# Altium PCB DualLink.PcbDoc
Units mil, origin at the board's own origin, x right, y up, seen from the top; angles counter-clockwise.
Board outline 2100 x 1100 mil, 2 copper layers (Top Layer, Bottom Layer); 48 components, 41 nets, 162 pads, 49 vias.
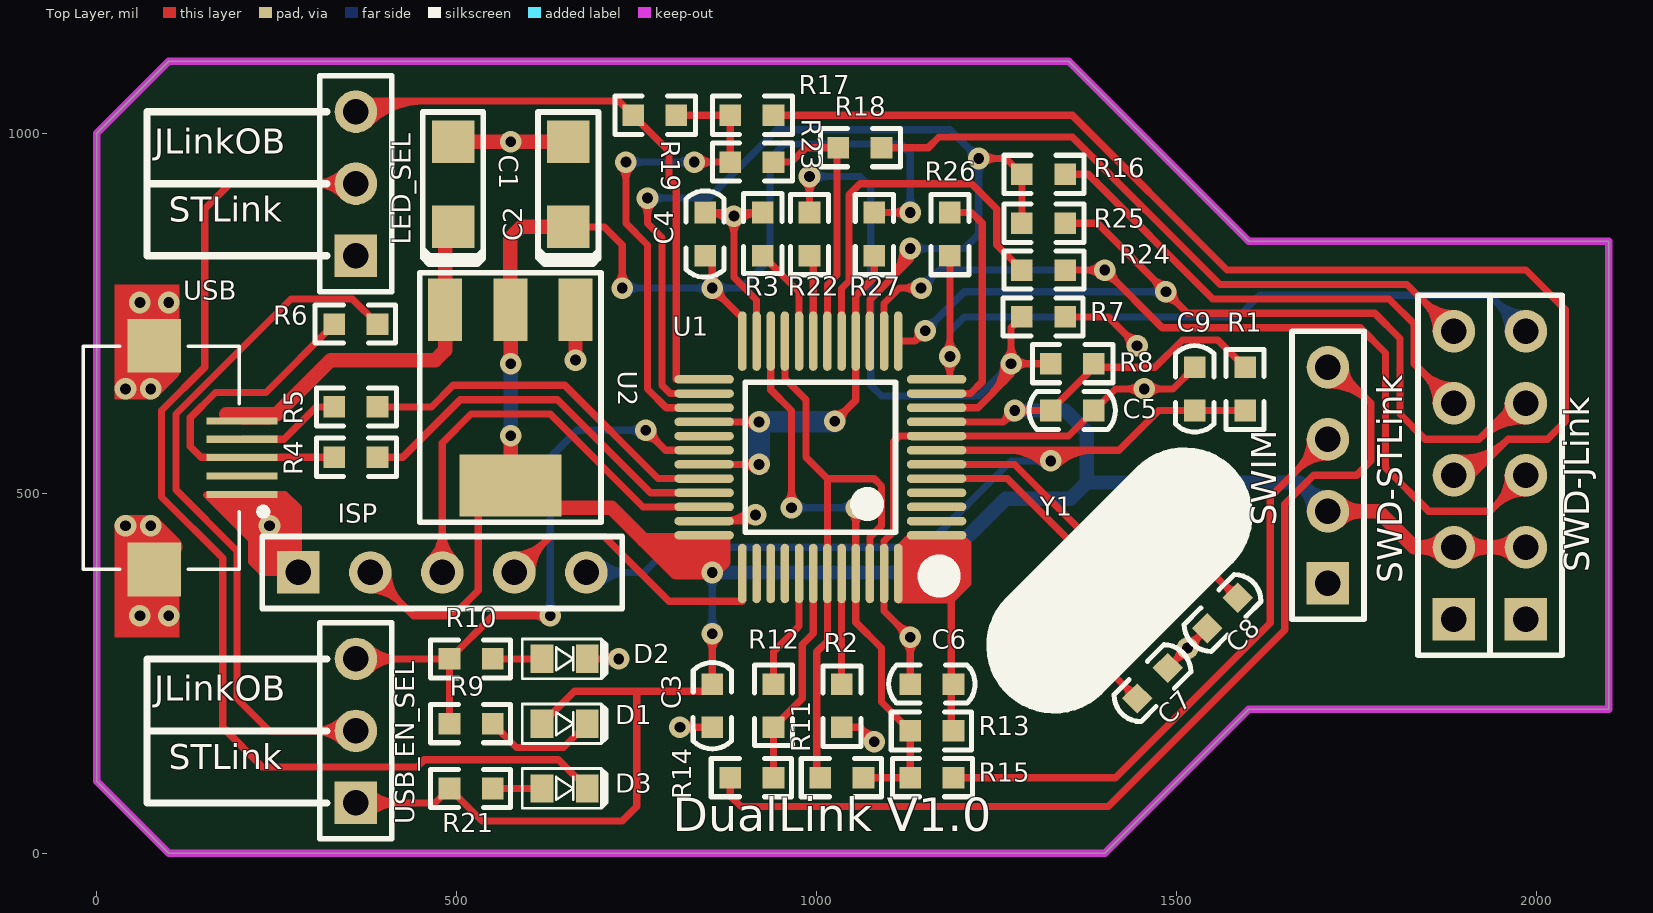
[diagram p0: Top Layer view]
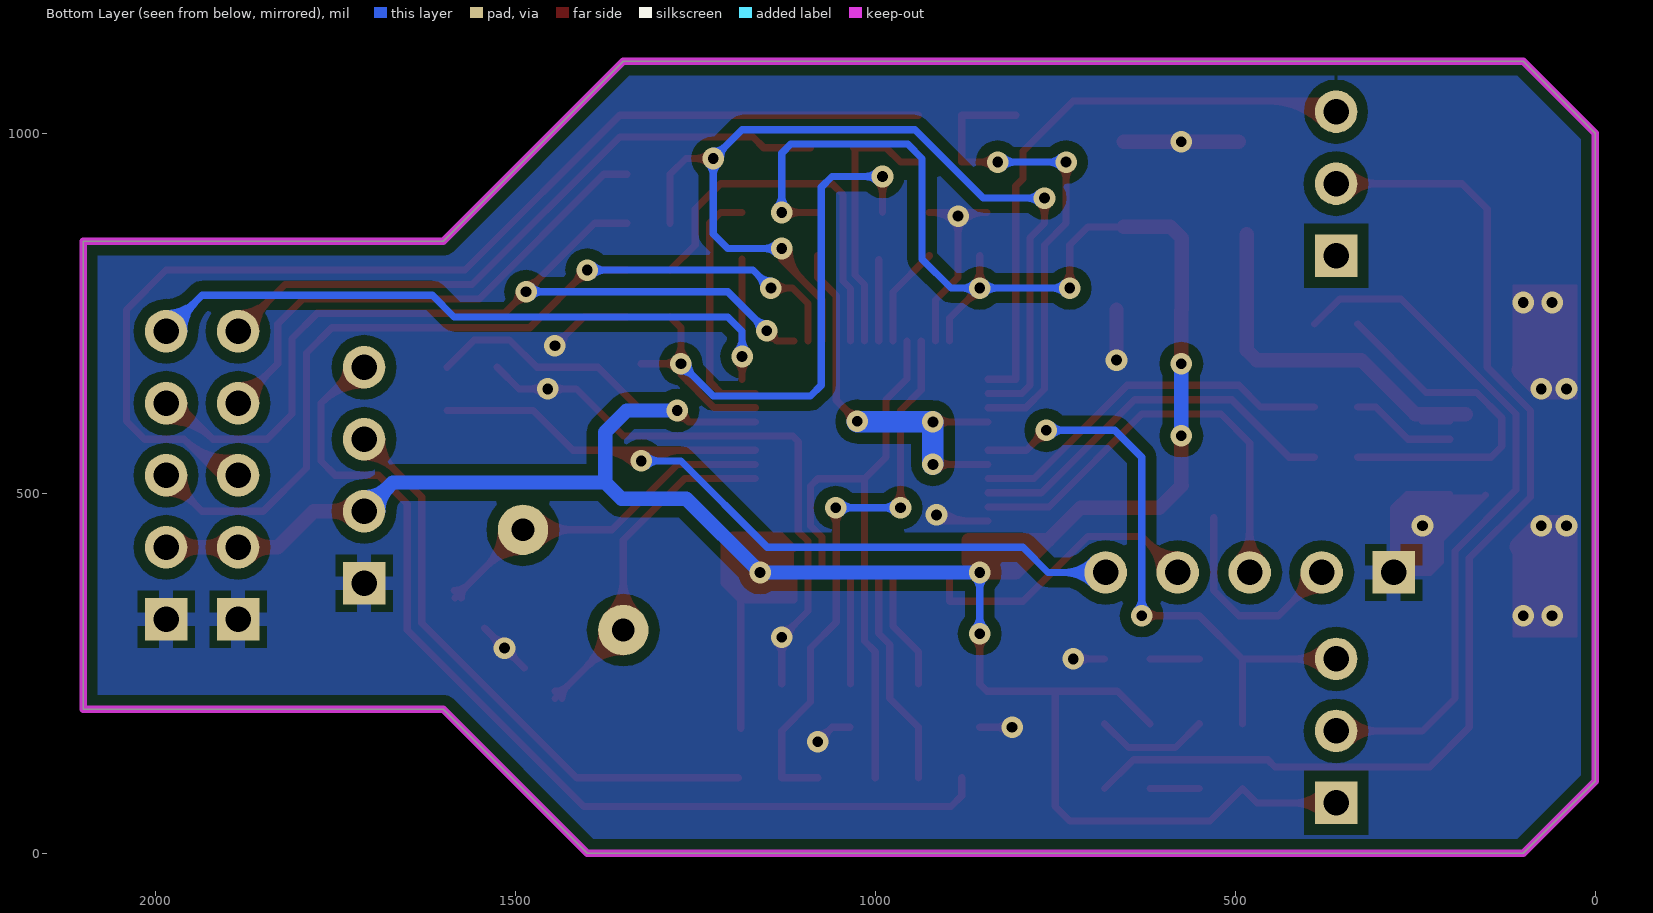
[diagram p1: Bottom Layer view, seen from below]
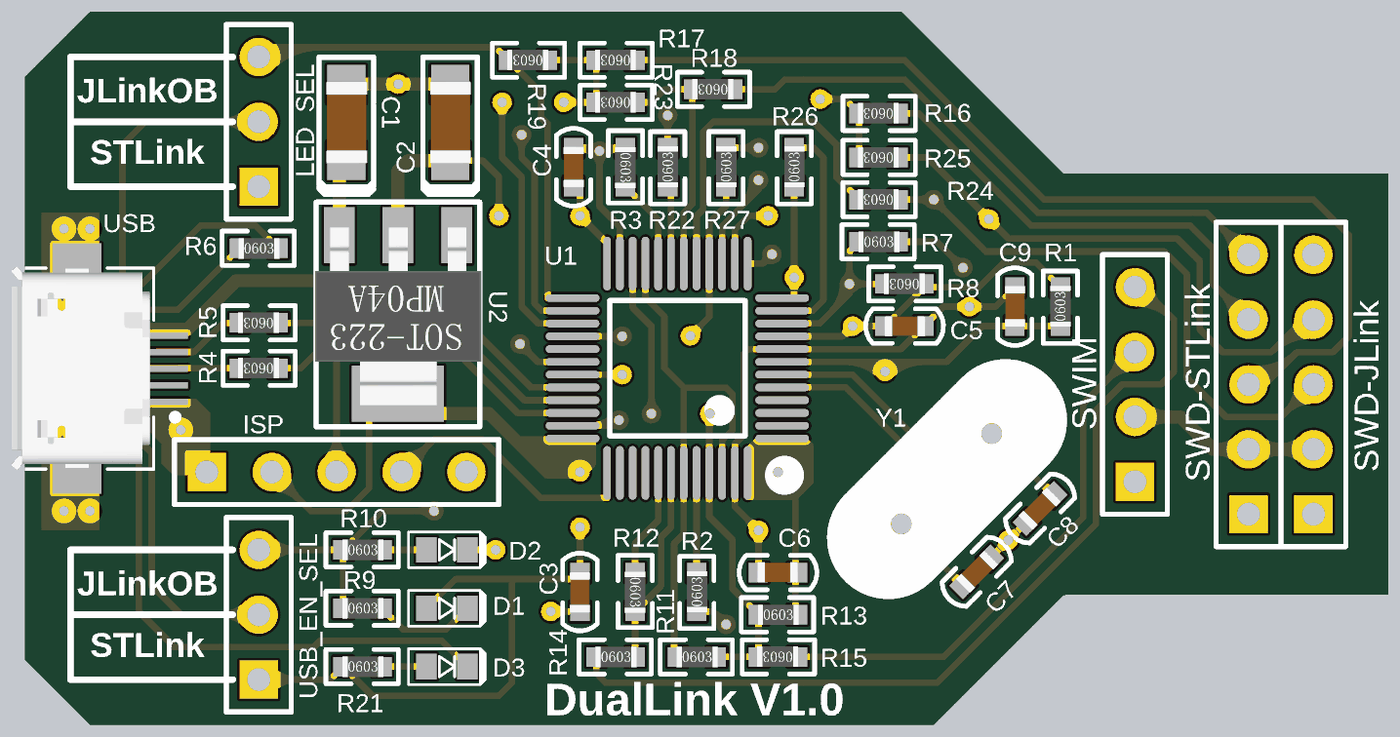
[diagram p2: 3D render of the assembled board from above, using the file's embedded part models]

## Layer stack, top to bottom
Top Layer: signal copper 1.4
Dielectric: dielectric 12.6, FR-4, Dk 4.8
Bottom Layer: signal copper 1.4

## Board outline
0,100 100,0 1400,0 1600,200 2100,200 2100,850 1600,850 1350,1100 100,1100 0,1000

## Design rules (kind name [scope] priority, off if disabled: settings)
Clearance Clearance_1 [InPolygon] p1: gap=15
Clearance [All] p2: gap=7
ComponentClearance [All] p1: gap=0 collisioncheckmode=3 verticalgap=0 showdistances=FALSE
MinimumSolderMaskSliver [All] p1: minsoldermaskwidth=0
PolygonConnect PolygonConnect_1 [isvia] p1: connectstyle=Direct reliefconductorwidth=10 reliefentries=4 polygonreliefangle="90 Angle" airgapwidth=10
PolygonConnect [All] p2: connectstyle=Relief reliefconductorwidth=20 reliefentries=4 polygonreliefangle="90 Angle" airgapwidth=10
RoutingVias [All] p1: holewidth=28 width=50 viastyle="Through Hole" minholewidth=10 minwidth=50 maxholewidth=28 maxwidth=500
SilkToSilkClearance [All] p1: silktosilkclearance=0
SilkToSolderMaskClearance [IsPad] p1: minsilkscreentomaskgap=0 clearancetoexposedcopper=TRUE
SolderMaskExpansion [All] p1: expansion=4
Width [All] p1: maxlimit=1000 minlimit=10 preferedwidth=10
24 further rules are at their usual default settings.

## Components (designator, comment, footprint, x,y, rotation, side; value= is the part's Value field where it differs from the comment)
C1 "" C1206A 495,870 r90 top
C2 "" C1206A 655,870 r90 top
C3 "" C0603 855,235 r270 top
C4 "" C0603 845,830 r90 top
C5 "" C0603 1325,615 r0 top
C6 "" C0603 1190,235 r180 top
C7 "" C0603 1445,215 r45 top
C8 "" C0603 1585,355 r225 top
C9 "" C0603 1525,615 r90 top
D1 "红色" LED0603 650,180 r0 top
D2 "绿色" LED0603 650,270 r0 top
D3 "LED" LED0603 650,90 r0 top
ISP "SWD" HDR1X5 280,390 r0 top
LED_SEL "" HDR1X3 360,830 r90 top
R1 "" R0603 1595,615 r90 top
R2 "" R0603 1035,175 r90 top
R3 "" R0603 925,890 r270 top
R4 "" R0603 390,550 r180 top
R5 "" R0603 390,620 r180 top
R6 "" R0603 330,735 r0 top
R7 "" R0603 1285,745 r0 top
R8 "" R0603 1385,680 r180 top
R9 "" R0603 490,180 r0 top
R10 "" R0603 490,270 r0 top
R11 "" R0603 1005,105 r0 top
R12 "" R0603 940,235 r270 top
R13 "" R0603 1130,170 r0 top
R14 "" R0603 880,105 r0 top
R15 "" R0603 1190,105 r180 top
R16 "" R0603 1345,943 r180 top
R17 "" R0603 940,1025 r180 top
R18 "" R0603 1090,980 r180 top
R19 "" R0603 805,1025 r180 top
R21 "" R0603 490,90 r0 top
R22 "" R0603 990,830 r90 top
R23 "" R0603 940,960 r180 top
R24 "" R0603 1345,810 r180 top
R25 "" R0603 1345,875 r180 top
R26 "" R0603 1185,830 r90 top
R27 "" R0603 1080,830 r90 top
SWD-JLink "SWD" HDR1X5 1985,325 r90 top
SWD-STLink "SWD" HDR1X5 1885,325 r90 top
SWIM "SWIM" HDR1X4 1710,375 r90 top
U1 "STM32F103C8T6" LQFP48_M 1005,550 r180 top
U2 "AMS1117-3.3" SOT-223 665,755 r180 top
USB "USB_Micro" USB_MICRO_B 80,550 r270 top
USB_EN_SEL "" HDR1X3 360,70 r90 top
Y1 "8MHz" JZ 1350,310 r225 top

## Footprints (in the part's own frame and the unit in brackets; to place one, negate y for a bottom-side part, rotate by r counter-clockwise, add the part's x,y. Pads: shape width x height; smd on the part's side, far side on the other; paste and mask are expansions set on the pad)
C0603 [mil]
  rect 30x30 smd: 1(0,0) 2(60,0)
  silkscreen extent -30,-27 90,27, body extent -1,-16 62,15, height 24
C1206A [mm]
  rect 1.5x1.5 smd: 1(0,0) 2(3,0)
  silkscreen extent -1.32,-1.07 4.06,1.07, body extent -0.1,-0.81 3.1,0.79, height 0.95
HDR1X3 [mm] "Connector; Header; 3 Position"
  rect 1.5x1.5 hole 0.9: 1(0,0)
  round 1.5 hole 0.9: 2(2.54,0) 3(5.08,0)
  silkscreen extent -1.27,-1.27 6.35,1.27
HDR1X4 [mm] "Connector; Header; 4 Position"
  rect 1.5x1.5 hole 0.9: 1(0,0)
  round 1.5 hole 0.9: 2(2.54,0) 3(5.08,0) 4(7.62,0)
  silkscreen extent -1.27,-1.27 8.89,1.27
HDR1X5 [mm] "Connector; Header; 5 Position"
  rect 1.5x1.5 hole 0.9: 1(0,0)
  round 1.5 hole 0.9: 2(2.54,0) 3(5.08,0) 4(7.62,0) 5(10.16,0)
  silkscreen extent -1.27,-1.27 11.43,1.27
JZ [mil]
  round 70 hole 31.5: 1(0,0) 2(-197,0)
  silkscreen extent -315,-88 118,90
LED0603 [mm]
  rect 0.8x1 smd: 1(-0.8,0) 2(0.8,0)
  silkscreen extent -1.5,-0.7 1.5,0.7
LQFP48_M [mm] "Thin QFP, 48-Leads, Body 7x7mm, Pitch 0.5mm, IPC Low Density"
  oval 2.1x0.3 smd: 1(-4.1,2.75) 2(-4.1,2.25) 3(-4.1,1.75) 4(-4.1,1.25) 5(-4.1,0.75) 6(-4.1,0.25) 7(-4.1,-0.25) 8(-4.1,-0.75) 9(-4.1,-1.25) 10(-4.1,-1.75) 11(-4.1,-2.25) 12(-4.1,-2.75) 25(4.1,-2.75) 26(4.1,-2.25) 27(4.1,-1.75) 28(4.1,-1.25) 29(4.1,-0.75) 30(4.1,-0.25) 31(4.1,0.25) 32(4.1,0.75) 33(4.1,1.25) 34(4.1,1.75) 35(4.1,2.25) 36(4.1,2.75)
  oval 0.3x2.1 smd: 13(-2.75,-4.1) 14(-2.25,-4.1) 15(-1.75,-4.1) 16(-1.25,-4.1) 17(-0.75,-4.1) 18(-0.25,-4.1) 19(0.25,-4.1) 20(0.75,-4.1) 21(1.25,-4.1) 22(1.75,-4.1) 23(2.25,-4.1) 24(2.75,-4.1) 37(2.75,4.1) 38(2.25,4.1) 39(1.75,4.1) 40(1.25,4.1) 41(0.75,4.1) 42(0.25,4.1) 43(-0.25,4.1) 44(-0.75,4.1) 45(-1.25,4.1) 46(-1.75,4.1) 47(-2.25,4.1) 48(-2.75,4.1)
  silkscreen extent -4.57,-2.65 2.65,4.57, body extent -3.5,-3.5 3.5,3.5, height 1.6
R0603 [mil]
  rect 30x30 smd: 1(0,0) 2(60,0)
  silkscreen extent -26,-26 85,27, body extent -1,-16 62,15, height 18
SOT-223 [mm]
  rect 1.2x2.2 smd: 1(0,0) 2(2.3,0) 3(4.6,0)
  rect 3.6x2.2 smd: 4(2.3,6.2)
  silkscreen extent -0.9,-1.3 5.5,7.5, body extent -0.97,-0.31 5.53,6.66
USB_MICRO_B [mm]
  rect 0.25x2.5 smd: 1(-1.287,3.095) 2(-0.637,3.095) 3(0.013,3.095) 4(0.663,3.095) 5(1.313,3.095)
  rect 1.9x1.9 smd: 5(-3.937,0) 5(3.963,0)
  silkscreen extent -3.92,-2.51 3.95,3.97, body extent -3.99,-2.58 3.99,2.85, height 2.71

## Part data
C1 C2: library part "Cap Pol3", "Polarized Capacitor (Surface Mount)"
C3 C4 C5 C6 C7 C8 C9: library part Cap, "Capacitor"
D1 D2 D3: library part LED2, "Typical RED, GREEN, YELLOW, AMBER GaAs LED"
ISP SWD-JLink SWD-STLink: library part "Header 5", "Header, 5-Pin"
LED_SEL USB_EN_SEL: library part "Header 3", "Header, 3-Pin"
R1 R2 R3 R4 R5 R6 R7 R8 R9 R10 R11 R12 R13 R14 R15 R16 R17 R18 R19 R21 R22 R23 R24 R25 R26 R27: library part Res2, "Resistor"
SWIM: library part "Header 4", "Header, 4-Pin"
U1: "STM32 ARM-based 32-bit MCU with 64 Kbytes Flash, 48-pin LQFP, Industrial Temperature"
U2: library part TL783C
USB: "USB"
Y1: library part XTAL, "Crystal Oscillator"

## Via types
v1: diameter 30, hole 15, Top Layer to Bottom Layer, 34 vias
v2: diameter 30, hole 15, Top Layer to Bottom Layer, tented both sides, 15 vias

## Nets (pads, with @x,y where several pads share a name; then routed paths per layer and width w, separated by ;. In a path a pad name is that pad's centre, name@x,y a point inside that pad or via, vN(x,y) a via of type N, cw(c..) or ccw(c..) an arc to the next point about the centre after c; other vN are vias at no path point)
BOOT0: R2.2 U1.44 | length 153.1
  Top Layer w10: R2.2@1034.53,235.47 U1.44
BOOT1: R3.2 U1.20 | length 139.5
  Top Layer w10: R3.2 975.47,779.53 U1.20
GND: C1.2 C2.2 C3.2 C4.2 C5.2 C6.2 C7.2 C8.2 C9.2 D2.2 ISP.1 R2.1 R3.1 R7.2 SWD-JLink.1 SWD-STLink.1 SWIM.1 U1.8 U1.23 U1.35 U1.47 U2.1 USB.5 | length 3047.6
  Top Layer w10: 152.5,497.5 215,435 215,405 230,390 ISP.1 280,480 261.69,498.31 USB.5@201.84,498.31 ; D2.2 v1(725,270) ; v1(810,175) C3.2 ; v1@817.07,167.93 cw(c834.14,150.86) 834.14,175 cw(c834.14,199.14) v1@817.07,182.07 ; U1.35 906.42,461.42 v2(915,470) cw(c894.28,490.72) 894.28,461.42 ; C4.2 R3.1 ; C4.2@848.79,890 cw(c848.79,848.79) 877.93,877.93 cw(c860.86,860.86) 885,860.86 cw(c909.14,860.86) 892.07,877.93 cw(c921.21,848.79) R3.1@921.21,890 ; U1.35@870.14,461.42 ccw(c870.14,514.86) v2@907.93,477.07 ; v2@885,890 885,800 916.42,768.58 U1.23 ; R2.1 1060,175 v2(1080,155) ; v2@1070,155 ccw(c1045.86,155) 1062.93,172.07 ccw(c1080,189.14) v2@1080,165 ; v1@1120,300 ccw(c1095.86,300) 1112.93,317.07 ccw(c1130,334.14) v1@1130,310 ; v1@1122.93,292.93 cw(c1105.86,275.86) 1130,275.86 cw(c1154.14,275.86) v1@1137.07,292.93 ; C6.2 v1(1130,300) 1093.58,336.42 U1.47 1093.58,433.58 1107,447 1107,572 1114.53,579.53 U1.8 1349.53,579.53 C5.2 1415,645 1495,645 C9.2 ; R7.2 1405,745 v2(1445,705) ; 1431.62,717.6 ccw(c1448.51,722.12) v2(1445,705) ; 1432.4,718.38 cw(c1427.88,701.49) v2(1445,705) ; C7.2 C8.2 ; v1@1505,285 cw(c1480.86,285) 1497.93,267.93 cw(c1515,250.86) v1@1515,275 ; v1@1515,295 ccw(c1515,319.14) 1532.07,302.07 ccw(c1549.14,285) v1@1525,285 ; 700.86,270 ccw(c700.86,294.14) 717.93,277.07 cw(c700.86,294.14) 700.86,270 ; 700.86,270 cw(c700.86,245.86) 717.93,262.93 ccw(c700.86,245.86) 700.86,270 ; 1427.93,722.07 ccw(c1445,739.14) 1445,715 cw(c1445,739.14) 1427.93,722.07 ; 1427.93,722.07 cw(c1410.86,705) 1435,705 ccw(c1410.86,705) 1427.93,722.07 ; 1430.86,645 ccw(c1430.86,669.14) 1447.93,652.07 cw(c1430.86,669.14) 1430.86,645 ; 1430.86,645 cw(c1430.86,620.86) 1447.93,637.93 ccw(c1430.86,620.86) 1430.86,645 ; 1479.14,645 ccw(c1479.14,620.86) 1462.07,637.93 cw(c1479.14,620.86) 1479.14,645 ; 1479.14,645 cw(c1479.14,669.14) 1462.07,652.07 ccw(c1479.14,669.14) 1479.14,645
  Top Layer w20: C1.2 C2.2 ; v1(665,685) U2.1
  Top Layer w30: 40,405 40,435 ; v1(75,645) USB.5@101.59,671.59 ; 90,435 40,435 ; USB.5@104.09,425.91 v1(75,455) v1(40,455) 40,435
  other v1: 1515,285 60,330 100,330 240,455 40,645 1455,645 60,765 100,765 575,988.11
  other v2: 885,885
ISP_RST: C9.1 ISP.5 R1.1 U1.7 | length 1585.5
  Top Layer w10: U1.7 1419.84,559.84 1475,615 R1.1 ; 1265.02,559.84 cw(c1265.02,485.02) v1@1317.93,537.93 ; 1289.17,559.84 cw(c1289.17,509.17) v1(1325,545) cw(c1360.83,509.17) 1360.83,559.84 ; 1313.31,559.84 cw(c1313.31,533.31) v1@1332.07,552.07 ; v1@1317.93,552.07 cw(c1336.69,533.31) 1336.69,559.84 ; v1@1332.07,537.93 cw(c1384.98,485.02) 1384.98,559.84
  Bottom Layer w10: ISP.5 760,390 795,425 1150,425 1270,545 v1(1325,545) ; ISP.5@690.27,379.73 cw(c715.07,354.93) 715.07,390 cw(c715.07,425.07) ISP.5@690.27,400.27 ; ISP.5@697.34,372.66 cw(c739.21,330.79) 739.21,390 cw(c739.21,449.21) ISP.5@697.34,407.34 ; v1@1317.93,537.93 ccw(c1300.86,520.86) 1300.86,545 ccw(c1300.86,569.14) v1@1317.93,552.07
ISP_SWCLK: ISP.4 U1.37 | length 561.4
  Top Layer w10: ISP.4 630,440 705,440 795,350 896.73,350 U1.37 ; ISP.4@580,404.53 ccw(c580,439.6) 604.8,414.8 ccw(c629.6,390) ISP.4@594.53,390 ; ISP.4@580,414.53 ccw(c580,473.74) 621.87,431.87 ccw(c663.74,390) ISP.4@604.53,390
ISP_SWDIO: ISP.3 U1.34 | length 761.6
  Top Layer w10: ISP.3@462.66,407.34 ccw(c420.79,449.21) 480,449.21 ccw(c539.21,449.21) ISP.3@497.34,407.34 ; ISP.3@469.73,400.27 ccw(c444.93,425.07) 480,425.07 ccw(c515.07,425.07) ISP.3@490.27,400.27 ; ISP.3 480,570 520,610 630,610 758.9,481.1 U1.34
JTCK: R16.2 R25.2 U1.15 U1.26 | length 1648.1
  Top Layer w10: v2@757.93,902.93 cw(c740.86,885.86) 765,885.86 cw(c789.14,885.86) v2@772.07,902.93 ; v2(765,910) 765,875 785,855 785,650 796.42,638.58 U1.26 ; U1.15 1073.9,768.9 1130,825 v2(1130,840) cw(c1093.79,840) 1119.39,814.39 ; 1102.32,797.32 ccw(c1059.64,840) v2@1120,840 ; v1(1225,965) 1263,965 R16.2 R25.2 ; v1@1232.07,957.93 cw(c1249.14,940.86) 1249.14,965 cw(c1249.14,989.14) v1@1232.07,972.07
  Bottom Layer w10: v2(765,910) 850,910 945,1005 1185,1005 v1(1225,965) 1225,860 1205,840 v2(1130,840) ; v2@772.07,902.93 cw(c789.14,885.86) 789.14,910 cw(c789.14,934.14) v2@772.07,917.07 ; v2@1137.07,832.93 cw(c1154.14,815.86) 1154.14,840 cw(c1154.14,864.14) v2@1137.07,847.07 ; v1@1215,965 ccw(c1190.86,965) 1207.93,982.07 ccw(c1225,999.14) v1@1225,975 ; v1@1217.93,957.93 cw(c1200.86,940.86) 1225,940.86 cw(c1249.14,940.86) v1@1232.07,957.93
JTMS: R17.2 R19.1 R23.2 U1.27 | length 853.5
  Top Layer w10: v1@727.93,952.93 cw(c710.86,935.86) 735,935.86 cw(c759.14,935.86) v1@742.07,952.93 ; v1(735,960) 735,875 765,845 765,645 791.1,618.9 U1.27 ; R19.1 R17.2 R23.2 v1(830,960) ; v1@837.07,952.93 cw(c854.14,935.86) 854.14,960 cw(c854.14,984.14) v1@837.07,967.07
  Bottom Layer w10: v1(735,960) v1(830,960) ; v1@742.07,952.93 cw(c759.14,935.86) 759.14,960 cw(c759.14,984.14) v1@742.07,967.07 ; v1@822.93,952.93 ccw(c805.86,935.86) 805.86,960 ccw(c805.86,984.14) v1@822.93,967.07
LED: R9.1 R10.1 U1.30 USB_EN_SEL.3 | length 1145.2
  Top Layer w10: USB_EN_SEL.3 R10.1 ; USB_EN_SEL.3@370.27,259.73 cw(c395.07,234.93) 395.07,270 cw(c395.07,305.07) USB_EN_SEL.3@370.27,280.27 ; USB_EN_SEL.3@377.34,252.66 cw(c419.21,210.79) 419.21,270 cw(c419.21,329.21) USB_EN_SEL.3@377.34,287.34 ; R9.1 R10.1 ; v2@622.93,322.93 ccw(c605.86,305.86) 605.86,330 ccw(c605.86,354.14) v2@622.93,337.07 ; v2(630,330) 550,330 R10.1 ; v2@762.5,577.5 cw(c762.5,553.36) 779.57,570.43 cw(c796.64,587.5) v2@772.5,587.5 ; v2(762.5,587.5) 790.16,559.84 U1.30
  Bottom Layer w10: v2@622.93,337.07 ccw(c605.86,354.14) 630,354.14 ccw(c654.14,354.14) v2@637.07,337.07 ; v2(630,330) 630,550 667.5,587.5 v2(762.5,587.5) ; v2@755.43,580.43 ccw(c738.36,563.36) 738.36,587.5 ccw(c738.36,611.64) v2@755.43,594.57
LED2: LED_SEL.3 R19.2 U1.25 | length 1033
  Top Layer w10: LED_SEL.3 375,1045 725,1045 R19.2 795,975 795,936.73 805,926.73 805,658.27 U1.25 ; LED_SEL.3@363.2,1026.8 cw(c407.14,982.86) 407.14,1045 ; LED_SEL.3@370.27,1019.73 cw(c431.29,958.71) 431.29,1045 ; LED_SEL.3@377.34,1012.66 cw(c455.43,934.57) 455.43,1045
NetD1_2: D1.2 R9.2 | length 158.8
  Top Layer w10: R9.2 583,147 648.5,147 D1.2
NetD2_1: D2.1 R10.2 | length 68.5
  Top Layer w10: R10.2 D2.1
NetD3_1: D3.1 R21.2 | length 68.5
  Top Layer w10: R21.2 D3.1
NetD3_2: D3.2 LED_SEL.2 | length 1702.7
  Top Layer w10: LED_SEL.2@342.66,912.66 ccw(c300.79,870.79) 300.79,930 ccw(c300.79,989.21) LED_SEL.2@342.66,947.34 ; LED_SEL.2@349.73,919.73 ccw(c324.93,894.93) 324.93,930 ccw(c324.93,965.07) LED_SEL.2@349.73,940.27 ; LED_SEL.2 185,930 150,895 150,675 90,615 90,495 175,410 175,175 230,120 445,120 455,130 641.5,130 D3.2
NetR4_1: R4.1 U1.33 | length 540.2
  Top Layer w10: R4.1 425,550 505,630 640,630 769.21,500.79 U1.33
NetR5_1: R5.1 U1.32 | length 519.7
  Top Layer w10: R5.1 465,620 495,650 650,650 779.53,520.47 U1.32
NetR6_2: R6.2 USB_EN_SEL.2 | length 1122.7
  Top Layer w10: USB_EN_SEL.2@342.66,152.66 ccw(c300.79,110.79) 300.79,170 ccw(c300.79,229.21) USB_EN_SEL.2@342.66,187.34 ; USB_EN_SEL.2@349.73,159.73 ccw(c324.93,134.93) 324.93,170 ccw(c324.93,205.07) USB_EN_SEL.2@349.73,180.27 ; USB_EN_SEL.2 240,170 195,215 195,420 110,505 110,610 270,770 355,770 R6.2
NetR14_1: R14.1 SWIM.4 | length 1512.8
  Top Layer w10: R14.1 880,80 895,65 1405,65 1650,310 1650,485 1690,525 1750,525 1770,545 1770,625 SWIM.4@1720,675 ; SWIM.4@1710,650.47 cw(c1710,567.12) 1768.94,626.06 ; SWIM.4@1710,660.47 cw(c1710,601.26) 1751.87,643.13 ; SWIM.4@1734.53,675 ccw(c1769.6,675) 1744.8,650.2
NetR15_1: R15.1 SWIM.3 | length 965.3
  Top Layer w10: R15.1 1415,105 1630,320 1630,495 SWIM.3 ; SWIM.3@1685.47,575 cw(c1626.26,575) 1668.13,533.13 cw(c1710,491.26) SWIM.3@1710,550.47 ; SWIM.3@1695.47,575 cw(c1660.4,575) 1685.2,550.2 cw(c1710,525.4) SWIM.3@1710,560.47
NetR16_1: R16.1 SWD-STLink.4 | length 852
  Top Layer w10: R16.1 1377,943 1550,770 1795,770 1830,735 1830,680 SWD-STLink.4 ; SWD-STLink.4@1860.47,625 ccw(c1801.26,625) 1843.13,666.87 ccw(c1885,708.74) SWD-STLink.4@1885,649.53 ; SWD-STLink.4@1870.47,625 ccw(c1835.4,625) 1860.2,649.8 ccw(c1885,674.6) SWD-STLink.4@1885,639.53
NetR17_1: R17.1 SWD-STLink.3 | length 1780
  Top Layer w10: R17.1 1355,1025 1570,810 1985,810 2040,755 2040,600 2015,575 1960,575 ; SWD-STLink.3@1884.42,519.56 ccw(c1888.46,557.68) 1915.57,530.57 ; SWD-STLink.3 1910,525 1960,575 ; SWD-STLink.3@1885.48,529.5 ccw(c1891.3,584.46) 1930.38,545.38 ; SWD-STLink.3@1886.53,539.45 ccw(c1894.14,611.24) 1945.19,560.19 ; SWD-STLink.3@1887.59,549.39 ccw(c1896.98,638.01) 1960,575
NetR18_1: R18.1 SWD-STLink.5 | length 1061.2
  Top Layer w10: R18.1 1155,980 1170,995 1355,995 1560,790 1820,790 SWD-STLink.5 ; SWD-STLink.5@1860.47,725 ccw(c1801.26,725) 1843.13,766.87 ccw(c1885,808.74) SWD-STLink.5@1885,749.53 ; SWD-STLink.5@1870.47,725 ccw(c1835.4,725) 1860.2,749.8 ccw(c1885,774.6) SWD-STLink.5@1885,739.53
NRST: R18.2 R23.1 U1.18 | length 372.3
  Top Layer w10: R23.1 965,960 985,980 R18.2 ; U1.18 1014.84,789.84 1028,803 R18.2@1028,980
OSC_IN: C7.1 U1.5 Y1.1 | length 895.5
  Top Layer w10: U1.5 1264.53,520.47 1350,435 Y1.1 C7.1 ; Y1.1@1328.79,331.21 ccw(c1277.57,382.43) 1350,382.43 ccw(c1422.43,382.43) Y1.1@1371.21,331.21 ; Y1.1@1335.86,324.14 ccw(c1301.72,358.28) 1350,358.28 ccw(c1398.28,358.28) Y1.1@1364.14,324.14 ; Y1.1@1350,280 cw(c1350,207.57) 1401.21,258.79 cw(c1452.43,310) Y1.1@1380,310 ; Y1.1@1350,290 cw(c1350,241.72) 1384.14,275.86 cw(c1418.28,310) Y1.1@1370,310 ; C7.1@1435,215 ccw(c1410.86,215) 1427.93,232.07 ccw(c1445,249.14) C7.1@1445,225
OSC_OUT: C8.1 U1.6 Y1.2 | length 911
  Top Layer w10: U1.6 1274.84,540.16 1365.7,449.3 Y1.2 C8.1@1583.6,355 ; Y1.2@1468.09,428.09 ccw(c1416.87,376.87) 1416.87,449.3 ccw(c1416.87,521.73) Y1.2@1468.09,470.51 ; Y1.2@1475.16,435.16 ccw(c1441.02,401.02) 1441.02,449.3 ccw(c1441.02,497.58) Y1.2@1475.16,463.44 ; Y1.2@1489.3,419.3 cw(c1489.3,346.87) 1540.51,398.09 cw(c1591.73,449.3) Y1.2@1519.3,449.3 ; Y1.2@1489.3,429.3 cw(c1489.3,381.02) 1523.44,415.16 cw(c1557.58,449.3) Y1.2@1509.3,449.3 ; 1565.54,373.06 ccw(c1585,392.52) C8.1@1585,365 ; 1568.92,369.68 cw(c1554.24,355) C8.1@1575,355
PA0: R7.1 R8.2 R22.2 U1.10 | length 1165.4
  Top Layer w10: v2@982.93,932.93 cw(c965.86,915.86) 990,915.86 cw(c1014.14,915.86) v2@997.07,932.93 ; R22.2 v2(990,940) ; U1.10 1223.9,618.9 1270,665 v2(1270,680) ; 1242.32,637.32 ccw(c1199.64,680) v2@1260,680 ; 1259.39,654.39 ccw(c1233.79,680) v2(1270,680) ; v2@1262.93,687.07 ccw(c1245.86,704.14) 1270,704.14 ccw(c1294.14,704.14) 1277.07,687.07 ccw(c1294.14,704.14) 1294.14,680 ccw(c1294.14,655.86) v2@1277.07,672.93 ; R7.1 1270,730 v2(1270,680) ; R8.2 v2(1270,680)
  Bottom Layer w10: v2(990,940) 1060,940 1075,925 1075,650 1090,635 1225,635 v2(1270,680) ; v2@997.07,932.93 cw(c1014.14,915.86) 1014.14,940 cw(c1014.14,964.14) v2@997.07,947.07 ; v2@1260,680 cw(c1235.86,680) 1252.93,662.93 cw(c1270,645.86) v2@1270,670
RX: R27.1 U1.16 U1.28 U1.31 | length 835.1
  Top Layer w10: U1.31 v1(920,540.16) ; U1.28 v2(920,599.21) ; v1@912.93,533.09 ccw(c895.86,516.02) 895.86,540.16 ccw(c895.86,564.3) v1@912.93,547.23 ; v2@912.93,592.14 ccw(c895.86,575.07) 895.86,599.21 ccw(c895.86,623.35) v2@912.93,606.28 ; v1(1025,600) 1054.21,629.21 U1.16 1054.21,774.21 1080,800 R27.1 ; v1@1025,610 ccw(c1025,634.14) 1042.07,617.07 ccw(c1059.14,600) v1@1035,600
  Bottom Layer w10: v1@912.93,547.23 ccw(c895.86,564.3) 920,564.3 ccw(c944.14,564.3) v1@927.07,547.23 ; v2@912.93,592.14 cw(c895.86,575.07) 920,575.07 cw(c944.14,575.07) 927.07,592.14 cw(c944.14,575.07) 944.14,599.21 cw(c944.14,623.35) v2@927.07,606.28 ; 998.96,599.21 ccw(c998.96,626.04) v1@1017.93,607.07 ; 1002.76,599.21 cw(c1002.76,577.76) v1@1017.93,592.93
  Bottom Layer w30: v1(920,540.16) v2(920,599.21) v1@1025,599.21
SWIM: R11.2 R13.1 R15.2 U1.22 U1.45 | length 940.7
  Top Layer w10: U1.22 936.1,643.9 965,615 v2(965,480) ; v2@957.93,487.07 ccw(c940.86,504.14) 965,504.14 ccw(c989.14,504.14) v2@972.07,487.07 ; v1@1047.93,472.93 cw(c1032.76,457.76) 1054.21,457.76 ; 1054.21,453.96 cw(c1081.04,453.96) v1@1062.07,472.93 ; v1@1054.21,479.21 U1.45 1054.21,320.79 1090,285 1090,210 R13.1 R15.2 1080,105
  Bottom Layer w10: v2(965,480) v1(1055,480) ; v2@972.07,472.93 cw(c989.14,455.86) 989.14,480 cw(c989.14,504.14) v2@972.07,487.07 ; v1@1047.93,472.93 ccw(c1030.86,455.86) 1030.86,480 ccw(c1030.86,504.14) v1@1047.93,487.07
SWIM_IN: R11.1 U1.21 U1.43 U1.46 | length 844.5
  Top Layer w10: U1.21 955.79,659.21 985,630 985,550 1014.84,520.16 ; R11.1@1000,105 1000,280 1014.84,294.84 U1.43 1014.84,520.16 ; U1.46 1073.9,438.9 1090,455 1090,510 1079.84,520.16 1014.84,520.16
SWIM_RST: R12.2 R14.2 U1.42 | length 306.4
  Top Layer w10: R14.2 R12.2 980,215 980,290 995.16,305.16 U1.42
SWIM_RST_IN: R12.1 U1.41 | length 168.3
  Top Layer w10: R12.1 940,280 975.47,315.47 U1.41
TCKIN: R25.1 SWD-JLink.4 U1.13 | length 1795.8
  Top Layer w10: U1.13 1136.42,711.42 ; v2@1140.8,724.38 cw(c1125.51,722.32) 1136.42,711.42 ; v2@1149.38,715.8 ccw(c1147.32,700.51) 1136.42,711.42 ; v2(1150.71,725.71) 1136.42,711.42 ; R25.1 1390,875 1515,750 1775,750 1810,715 1810,610 1845,575 1920,575 ; 1471.62,792.6 ccw(c1488.51,797.12) v1(1485,780) ; 1472.4,793.38 cw(c1467.88,776.49) v1(1485,780) ; 1497.6,766.62 cw(c1502.12,783.51) v1(1485,780) ; 1498.38,767.4 ccw(c1481.49,762.88) v1(1485,780) ; 1936.37,591.37 cw(c1982.58,545.16) SWD-JLink.4@1984.56,610.48 ; 1952.73,607.73 cw(c1983.54,576.92) SWD-JLink.4@1984.86,620.47 ; 1953.74,608.74 ccw(c1937.47,625) SWD-JLink.4@1960.47,625 ; SWD-JLink.4@1984.26,600.48 ccw(c1981.62,513.39) 1920,575 ; SWD-JLink.4 1970,625 1920,575 ; 1467.93,797.07 ccw(c1485,814.14) 1485,790 cw(c1485,814.14) 1467.93,797.07 ; 1467.93,797.07 cw(c1450.86,780) 1475,780 ccw(c1450.86,780) 1467.93,797.07 ; 1502.07,762.93 ccw(c1485,745.86) 1485,770 cw(c1485,745.86) 1502.07,762.93 ; 1502.07,762.93 cw(c1519.14,780) 1495,780 ccw(c1519.14,780) 1502.07,762.93
  Bottom Layer w10: v2(1150.71,725.71) 1205,780 v1(1485,780) ; v2@1150.71,735.71 ccw(c1150.71,759.85) 1167.78,742.78 ccw(c1184.85,725.71) v2@1160.71,725.71 ; 1460.86,780 ccw(c1460.86,804.14) 1477.93,787.07 cw(c1460.86,804.14) 1460.86,780 ; 1460.86,780 cw(c1460.86,755.86) 1477.93,772.93 ccw(c1460.86,755.86) 1460.86,780
TMSIN: R24.1 SWD-JLink.3 U1.14 | length 1761.2
  Top Layer w10: U1.14 1093.58,763.58 1115,785 v1(1145,785) ; v1@1137.93,777.93 ccw(c1120.86,760.86) 1120.86,785 ccw(c1120.86,809.14) v1@1137.93,792.07 ; R24.1 v2(1400,810) ; 1412.6,796.62 cw(c1417.12,813.51) v2(1400,810) ; 1413.38,797.4 ccw(c1396.49,792.88) v2(1400,810) ; SWD-JLink.3@1960.47,525 cw(c1901.26,525) 1943.13,483.13 cw(c1985,441.26) SWD-JLink.3@1985,500.47 ; SWD-JLink.3@1970.47,525 cw(c1935.4,525) 1960.2,500.2 cw(c1985,475.4) SWD-JLink.3@1985,510.47 ; SWD-JLink.3 1935,475 1850,475 1790,535 1790,695 1755,730 1480,730 v2(1400,810) ; 1375.86,810 ccw(c1375.86,834.14) 1392.93,817.07 cw(c1375.86,834.14) 1375.86,810 ; 1375.86,810 cw(c1375.86,785.86) 1392.93,802.93 ccw(c1375.86,785.86) 1375.86,810 ; 1417.07,792.93 ccw(c1400,775.86) 1400,800 cw(c1400,775.86) 1417.07,792.93 ; 1417.07,792.93 cw(c1434.14,810) 1410,810 ccw(c1434.14,810) 1417.07,792.93
  Bottom Layer w10: v1(1145,785) 1170,810 v2(1400,810) ; v1@1145,795 ccw(c1145,819.14) 1162.07,802.07 ccw(c1179.14,785) v1@1155,785 ; 1375.86,810 ccw(c1375.86,834.14) 1392.93,817.07 cw(c1375.86,834.14) 1375.86,810 ; 1375.86,810 cw(c1375.86,785.86) 1392.93,802.93 ccw(c1375.86,785.86) 1375.86,810
TMSOUT: R24.2 U1.17 | length 533.1
  Top Layer w10: U1.17 1034.53,784.53 1045,795 1045,915 1060,930 1215,930 1250,895 1250,845 R24.2
TRESIN: R26.1 SWD-JLink.5 U1.12 | length 1305
  Top Layer w10: v1@1177.93,682.93 cw(c1160.86,665.86) 1185,665.86 cw(c1209.14,665.86) v1@1192.07,682.93 ; v1@1177.93,697.07 ccw(c1160.86,714.14) 1185,714.14 ccw(c1209.14,714.14) v1@1192.07,697.07 ; U1.12@1185,658.27 v1(1185,690) R26.1@1185,825
  Bottom Layer w10: v1@1177.93,697.07 ccw(c1160.86,714.14) 1185,714.14 ccw(c1209.14,714.14) v1@1192.07,697.07 ; v1(1185,690) 1185,725 1205,745 1585,745 1615,775 1935,775 SWD-JLink.5 ; SWD-JLink.5@1960.47,725 ccw(c1901.26,725) 1943.13,766.87 ccw(c1985,808.74) SWD-JLink.5@1985,749.53 ; SWD-JLink.5@1970.47,725 ccw(c1935.4,725) 1960.2,749.8 ccw(c1985,774.6) SWD-JLink.5@1985,739.53
TRESOUT: R26.2 U1.11 | length 341.6
  Top Layer w10: U1.11 1213.58,638.58 1230,655 1230,875 1215,890 R26.2
TRSTIN: R22.1 U1.19 | length 113.4
  Top Layer w10: U1.19 R22.1@995.16,824.84
USB_DM: R5.2 USB.2 | length 146.8
  Top Layer w10: USB.2 260.08,575.08 305,620 R5.2
USB_DP: R4.2 R6.1 USB.3 | length 500.1
  Top Layer w10: R4.2 145,550 130,565 130,605 165,640 235,640 R6.1
V5.0: C1.1 U2.3 USB.1 | length 540.6
  Top Layer w10: USB.1 USB.1@240.67,600.67
  Top Layer w20: 180,610 250,610 325,685 470,685 483.9,698.9 C1.1@483.9,860
VCC: C2.1 C3.1 C4.1 C5.1 C6.1 D1.1 ISP.2 R1.2 R8.1 R13.2 R21.1 R27.2 SWD-JLink.2 SWD-STLink.2 SWIM.2 U1.1 U1.9 U1.24 U1.36 U1.48 U2.2 U2.4 USB_EN_SEL.1 | length 6780.7
  Top Layer w10: USB_EN_SEL.1 470,70 R21.1 535,45 730,45 750,65 750,225 ; USB_EN_SEL.1@370.27,59.73 cw(c395.07,34.93) 395.07,70 cw(c395.07,105.07) USB_EN_SEL.1@370.27,80.27 ; USB_EN_SEL.1@377.34,52.66 cw(c419.21,10.79) 419.21,70 cw(c419.21,129.21) USB_EN_SEL.1@377.34,87.34 ; ISP.2@380,365.47 cw(c380,306.26) 421.87,348.13 cw(c463.74,390) ISP.2@404.53,390 ; ISP.2@380,375.47 cw(c380,340.4) 404.8,365.2 cw(c429.6,390) ISP.2@394.53,390 ; ISP.2@380,385 ISP.2 440,330 495,330 530,365 530,466.46 ; D1.1 663.5,225 750,225 ; C2.1 705,870 730,845 v1(730,785) ; v1@722.93,792.07 ccw(c705.86,809.14) 730,809.14 ccw(c754.14,809.14) v1@737.07,792.07 ; v1@847.93,297.93 cw(c830.86,280.86) 855,280.86 cw(c879.14,280.86) v1@862.07,297.93 ; v1@847.93,792.07 ccw(c830.86,809.14) 855,809.14 ccw(c879.14,809.14) v1@862.07,792.07 ; v1(855,305) C3.1 845,225 750,225 ; v1@855,775 cw(c855,750.86) 872.07,767.93 cw(c889.14,785) v1@865,785 ; C4.1@855,830 v1(855,785) 896.73,743.27 U1.24 ; R27.2 v2(1130,890) ; U1.48 1113.27,351.73 1186.73,351.73 ; U1.48@1113.27,423.27 1131.73,441.73 U1.1 1198.27,441.73 1210,430 1210,375 1186.73,351.73 ; v2@1122.93,882.93 ccw(c1105.86,865.86) 1105.86,890 ccw(c1105.86,914.14) v2@1122.93,897.07 ; U1.9 1259.21,599.21 ; R13.2@1186.73,173.27 1186.73,351.73 ; v1@1265.02,614.43 cw(c1245.13,613.3) 1259.21,599.21 ; v1@1274.43,605.02 ccw(c1273.3,585.13) 1259.21,599.21 ; v1@1282.07,607.93 cw(c1299.14,590.86) 1299.14,615 cw(c1299.14,639.14) v1@1282.07,622.07 ; R1.2 1557,713 1508,713 1470,675 1385,675 C5.1 v1(1275,615) 1259.21,599.21
  Top Layer w20: U2.4 605.35,480 715,480 760,435 ; U2.2 574.45,854.45 590,870 C2.1 ; U2.4@575,511.46 v1(575,580) ; v1(575,680) U2.2@575,754.45 ; v1@851.65,393.71 ccw(c814.38,435) 870,435 ; SWIM.2 1780,475 1830,425 SWD-STLink.2 SWD-JLink.2 ; SWIM.2@1723.81,461.19 cw(c1757.14,427.86) 1757.14,475 cw(c1757.14,522.14) SWIM.2@1723.81,488.81 ; SWD-STLink.2@1871.19,411.19 ccw(c1837.86,377.86) 1837.86,425 ccw(c1837.86,472.14) SWD-STLink.2@1871.19,438.81 ; SWD-STLink.2@1898.81,411.19 cw(c1932.14,377.86) 1932.14,425 cw(c1932.14,472.14) SWD-STLink.2@1898.81,438.81 ; SWD-JLink.2@1971.19,411.19 ccw(c1937.86,377.86) 1937.86,425 ccw(c1937.86,472.14) SWD-JLink.2@1971.19,438.81 ; 760,435 805,390 v1(855,390) 870,405 870,435 ; 760,435 870,435
  Bottom Layer w10: v1(730,785) v1(855,785) 895,785 935,825 935,965 955,985 1117.3,985 1130,972.3 v2(1130,890) ; v1@737.07,777.93 cw(c754.14,760.86) 754.14,785 cw(c754.14,809.14) v1@737.07,792.07 ; v1@847.93,312.07 ccw(c830.86,329.14) 855,329.14 ccw(c879.14,329.14) v1@862.07,312.07 ; v1@847.93,382.93 cw(c830.86,365.86) 855,365.86 cw(c879.14,365.86) v1@862.07,382.93 ; v1@847.93,777.93 ccw(c830.86,760.86) 830.86,785 ccw(c830.86,809.14) v1@847.93,792.07 ; v1(855,305) v1(855,390) ; v1@862.07,777.93 cw(c879.14,760.86) 879.14,785 cw(c879.14,809.14) v1@862.07,792.07 ; v2@1122.93,897.07 ccw(c1105.86,914.14) 1130,914.14 ccw(c1154.14,914.14) v2@1137.07,897.07
  Bottom Layer w20: v1(575,580) v1(575,680) ; v1(855,390) v1(1160,390) 1262.5,492.5 1352.5,492.5 1375,515 ; v1(1275,615) 1345,615 1375,585 1375,515 ; SWIM.2@1690.47,475 ccw(c1643.33,475) 1676.66,508.34 ccw(c1710,541.67) SWIM.2@1710,494.53 ; SWIM.2 1670,515 1375,515
pads on no net: LED_SEL.1 U1.2 U1.3 U1.4 U1.29 U1.38 U1.39 U1.40 USB.4

## Polygon pours and split planes (outlines as drawn)
GND on Bottom Layer "Bottom Layer-No Net" (solid, remove dead copper, pour order 3): 2100,200 1600,200 1400,0 100,0 0,100 0,1000 100,1100 1350,1100 1600,850 2100,850 2100,205 2095,200

## Keep-outs
Keep-Out Layer:
  the board outline again, w10

## Other copper
Top Layer:
  rectangle net GND: 25,665 115,790
  rectangle net GND: 25,300 115,430
  rectangle net GND: 25,630 75,665
  region net VCC: 870,435 870,405 855,390 805,390 760,435
  region net VCC: 1198.27,441.73 1210,430 1210,375 1186.73,351.73 1113.27,351.73 1113.27,423.27 1131.73,441.73
  region net GND: 152.5,497.5 153.31,498.31 261.69,498.31 280,480 280,390 230,390 215,405 215,435

## Silkscreen, mask and mechanical layers (free items; w line width, h text height)
Top Overlay:
  lines w10: 320,70 70,70 70,170 ; 320,170 70,170 ; 320,270 70,270 70,170 ; 320,830 70,830 70,930 ; 320,930 70,930 ; 320,1030 70,1030 70,930
  text "JLinkOB" at 80,960 h60
  text "STLink" at 100,865 h60
  text "JLinkOB" at 80,200 h60
  text "STLink" at 100,105 h60
  text "DualLink V1.0" at 800,15 h80